# Altium PCB linkit-v4-0.3_6layers.PcbDoc (part 5 of 6)
Units mm, origin at the board's own origin, x right, y up, seen from the top; angles counter-clockwise.
Board outline 70 x 35 mm, 6 copper layers (Top Layer, Int1 (GND), Int2 (Sign), Int3 (Sign), Int4 (PWR), Bottom Layer), stack 1.551 mm thick; 185 components, 156 nets, 761 pads, 1071 vias.
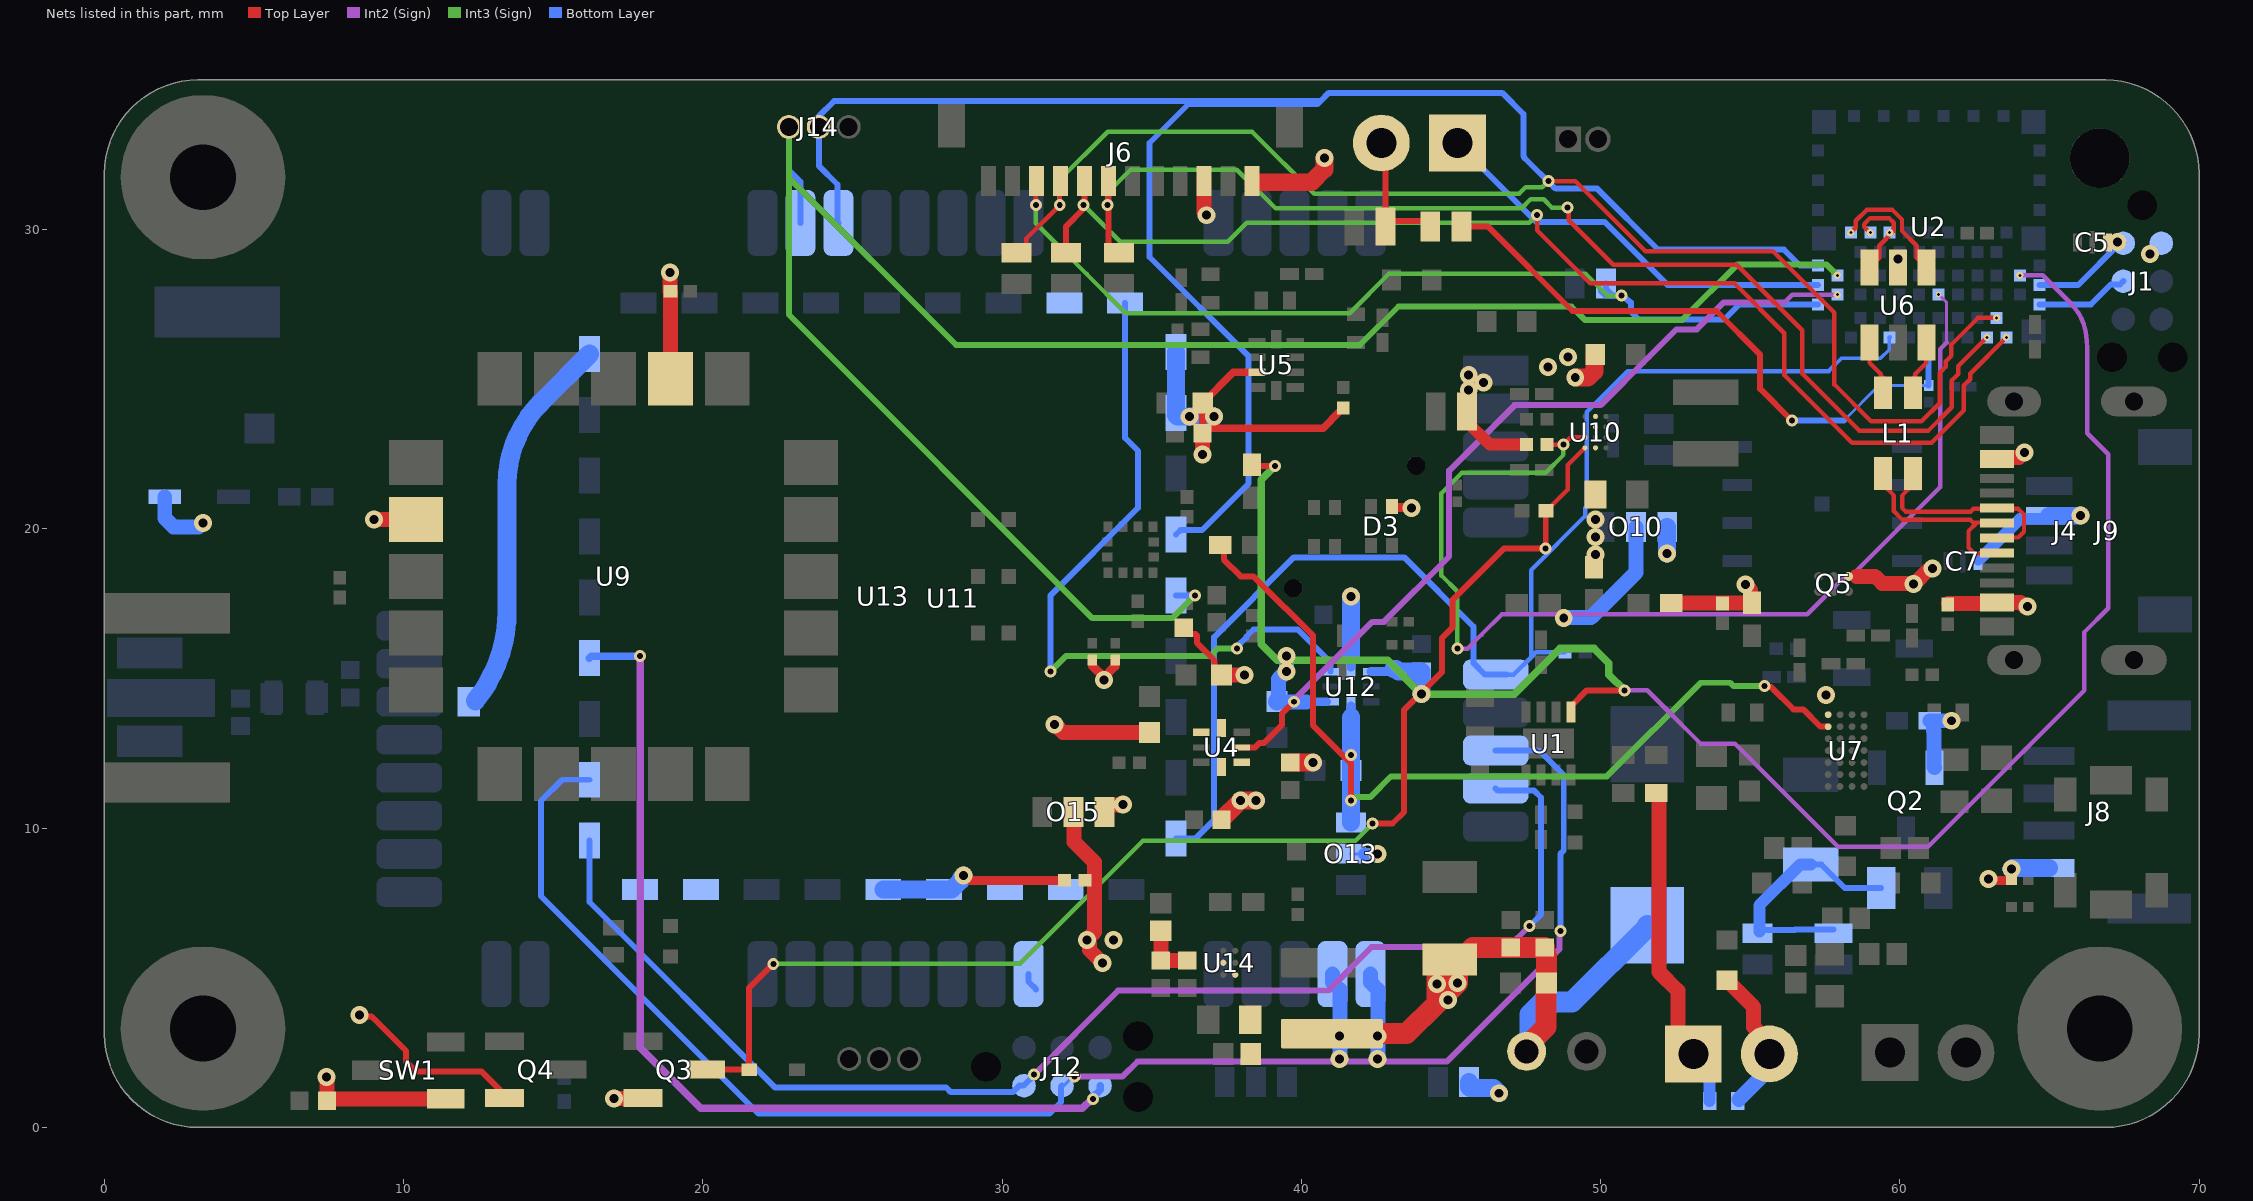
[diagram p8: the nets of this part, all layers, seen from the top]

## Via types
v1: diameter 0.4, hole 0.2, Top Layer to Int1 (GND), tented both sides, 275 vias
v2: diameter 0.4 (per signal layer), hole 0.2, Int1 (GND) to Int2 (Sign), tented both sides, 205 vias
v3: diameter 0.4, hole 0.2, Int1 (GND) to Bottom Layer, tented both sides, 147 vias
v4: diameter 0.4/0.4 (per signal layer), hole 0.2, Int1 (GND) to Int3 (Sign), tented both sides, 103 vias
v5: diameter 0.4, hole 0.2, Int3 (Sign) to Bottom Layer, tented both sides, 48 vias
v6: diameter 0.4, hole 0.2, Top Layer to Int3 (Sign), tented both sides, 46 vias
v7: diameter 0.6, hole 0.3, Top Layer to Int4 (PWR), tented both sides, 38 vias
v8: diameter 0.4/0.4/0.4/0.4 (per signal layer), hole 0.2, Top Layer to Bottom Layer, tented both sides, 33 vias
v9: diameter 0.4, hole 0.2, Int1 (GND) to Int2 (Sign), tented both sides, 23 vias
v10: diameter 0.4, hole 0.2, Int2 (Sign) to Bottom Layer, tented both sides, 20 vias
v11: diameter 0.6, hole 0.3, Int4 (PWR) to Bottom Layer, tented both sides, 19 vias
v12: diameter 0.25, hole 0.1, Int2 (Sign) to Bottom Layer, tented both sides, 17 vias
v13: diameter 0.4, hole 0.2, Top Layer to Int2 (Sign), tented both sides, 16 vias
v14: diameter 0.25, hole 0.1, Int3 (Sign) to Bottom Layer, tented both sides, 14 vias
v15: diameter 0.5, hole 0.2, Top Layer to Bottom Layer, tented both sides, 12 vias
v16: diameter 0.4, hole 0.2, Int2 (Sign) to Int3 (Sign), tented both sides, 10 vias
v17: diameter 0.25, hole 0.1, Top Layer to Bottom Layer, tented both sides, 7 vias
v18: diameter 0.6, hole 0.3, Top Layer to Bottom Layer, tented both sides, 6 vias
v19: diameter 0.4, hole 0.2, Top Layer to Bottom Layer, tented both sides, 5 vias
v20: diameter 0.2, hole 0.1, Int2 (Sign) to Bottom Layer, tented both sides, 5 vias
v21: diameter 0.226, hole 0.1, Top Layer to Int3 (Sign), tented both sides, 5 vias
v22: diameter 0.2, hole 0.1, Int1 (GND) to Bottom Layer, tented both sides, 4 vias
v23: diameter 0.6, hole 0.3, Int1 (GND) to Bottom Layer, tented both sides, 3 vias
v24: diameter 0.3, hole 0.2, Top Layer to Int1 (GND), tented both sides, 3 vias
v25: diameter 0.6, hole 0.3, Int3 (Sign) to Bottom Layer, tented both sides, 2 vias
v26: diameter 0.6, hole 0.3, Top Layer to Int1 (GND), tented both sides, 1 vias
v27: diameter 0.4, hole 0.2, Int4 (PWR) to Bottom Layer, tented both sides, 1 vias
v28: diameter 0.6, hole 0.3, Top Layer to Int2 (Sign), tented both sides, 1 vias
v29: diameter 0.25, hole 0.1, Int1 (GND) to Bottom Layer, tented both sides, 1 vias
v30: diameter 0.169, hole 0.1, Top Layer to Int2 (Sign), tented both sides, 1 vias

## Nets (pads, with @x,y where several pads share a name; then routed paths per layer and width w, separated by ;. In a path a pad name is that pad's centre, name@x,y a point inside that pad or via, vN(x,y) a via of type N, cw(c..) or ccw(c..) an arc to the next point about the centre after c; other vN are vias at no path point) (continued)
SAT_SWCLK: J12.4 U11.8@46.495,12.594 U13.25 | length 53.8
  Int2 (Sign) w0.2: v10(32.414,1.695) 34.021,1.695 34.525,2.198 44.863,2.198 48.631,5.966 48.631,6.542 v10(48.655,6.566)
  Bottom Layer w0.1: J12.4@32.004,1.397 32.06,1.397 32.358,1.695 v10(32.414,1.695) ; U11.8@46.495,12.594 U11.8@47.108,12.594
  Bottom Layer w0.2: U13.25@16.214,11.618 15.301,11.618 14.596,10.913 14.596,7.73 21.863,0.463 31.58,0.463 31.969,0.851 31.969,1.362 J12.4@32.004,1.397 ; U11.8@46.495,12.594 47.949,12.594 48.768,11.775 48.768,9.254 48.655,9.141 v10(48.655,6.566)
SAT_SWDIO: J12.2 U11.9@46.495,11.324 U13.26 | length 44.5
  Int2 (Sign) w0.2: v10(31.07,1.767) 33.875,4.572 40.894,4.572 42.344,6.022 46.916,6.022 v10(47.625,6.731)
  Bottom Layer w0.2: U13.26@16.214,9.586 16.214,7.535 22.406,1.343 28.128,1.343 28.289,1.182 30.361,1.182 30.575,1.397 30.717,1.397 31.07,1.75 v10(31.07,1.767) ; U11.9@46.495,11.324 46.565,11.254 47.778,11.254 48.006,11.026 48.006,7.112 v10(47.625,6.731)
SAT_SWO: J12.6 U13.23 | length 31.5
  Int2 (Sign) w0.25: v10(17.907,15.748) 17.907,2.667 19.939,0.635 32.684,0.635 32.998,0.949 v10(33.038,0.949)
  Bottom Layer w0.25: U13.23@16.214,15.682 16.28,15.748 v10(17.907,15.748) ; v10(33.038,0.949) 33.067,0.978 33.067,1.045 33.274,1.252 J12.6@33.274,1.397
SAT_UART_RX: J14.2 U2.6 U11.38@24.535,30.224 U13.5 | length 62.9
  Bottom Layer w0.2: U11.38@24.535,30.224 24.5,30.259 24.5,31.507 23.876,32.131 J14.2@23.876,33.433 23.876,33.782 24.392,34.298 40.648,34.298 ; U13.5@35.814,19.812 35.966,19.964 36.688,19.964 38.241,21.517 38.241,25.767 34.925,29.083 34.925,32.893 36.229,34.197 40.547,34.197 40.648,34.298 ; U2.6@57.26,28.799 56.659,28.799 56.12,29.337 51.916,29.337 49.884,31.369 48.706,31.369 48.563,31.369 cw(c48.564,31.569) 48.424,31.427 47.474,32.376 cw(c47.616,32.517) 47.416,32.516 47.416,33.864 46.709,34.571 40.921,34.571 40.648,34.298
SAT_UART_TX: J14.3 U2.5 U11.37@23.265,30.224 U13.4 | length 67.3
  Int3 (Sign) w0.2: J14.3@22.876,33.433 22.876,31.734 ; v5(36.449,17.78) 35.687,17.018 33.02,17.018 22.876,27.162 22.876,31.734 ; v14(57.91,28.474) 57.555,28.829 54.568,28.829 52.721,26.982 49.472,26.982 49.022,27.432 43.245,27.432 41.956,26.144 28.466,26.144 22.876,31.734
  Bottom Layer w0.2: J14.3@22.876,33.433 22.876,31.988 23.265,31.599 U11.37@23.265,30.224 ; U13.4@35.814,17.78 v5(36.449,17.78)
SAT_WKUP: R19.2 U2.44 U11.6@46.495,15.134 U13.0 | length 43.6
  Bottom Layer w0.12: 57.617,25.273 58.039,25.695 59.346,25.695 59.642,25.99 U2.44@59.642,26.38
  Bottom Layer w0.15: U11.6@46.855,15.134 47.095,15.134 47.677,15.716 ; R19.2@48.809,15.875 47.836,15.875 47.677,15.716 ; 57.617,25.273 50.906,25.273 49.53,23.897 49.53,20.752 49.48,20.702 49.48,20.428 47.677,18.625 47.677,15.716 ; U2.44@59.642,26.38 U2.44@59.66,26.399
  Bottom Layer w0.2: U13.0@35.814,9.652 36.449,9.652 37.084,10.287 37.084,16.383 39.751,19.05 43.434,19.05 45.745,16.739 45.745,15.523 46.134,15.134 U11.6@46.675,15.134 ; U11.6@46.495,15.134 U11.6@46.855,15.134
SLOW_SWS_SEND: J10.1 U2.4 | length 14
  Bottom Layer w0.146: 47.836,30.269 ccw(c47.94,30.372) 47.852,30.255
  Bottom Layer w0.2: J10.1@45.212,32.893 47.836,30.269 ; 47.852,30.255 50.136,30.255 52.242,28.149 U2.4@57.26,28.149
SMD_ANT: L4.2 U13.18 | length 12.8
  Bottom Layer w0.642: L4.2@12.405,14.258 ccw(c8.698,17.25) 13.462,17.25 13.462,21.501 cw(c17.303,21.499) 14.587,24.215 U13.18@16.214,25.842
SMD_RF_BUSY: U13.27
SMD_RF_NRST: U13.28
SMD_SCL: U13.33
SMD_SDA: U13.34
SMD_VPA_GOOD: U13.10
SPI_CLK: J6.8 O2.2 U2.32 | length 40.7
  Top Layer w0.15: v6(47.879,30.48) 47.879,29.972 49.651,28.2 54.477,28.2 56.14,26.537 56.14,25.14 58.4,22.88 61.058,22.88 62.135,23.957 62.135,24.792 62.346,25.004 62.346,25.185 v17(63.56,26.399)
  Top Layer w0.2: O2.2@32.131,29.223 32.131,30.101 32.754,30.724 J6.8@32.754,31.623
  Int3 (Sign) w0.15: v6(32.728,30.815) 33.952,29.591 37.545,29.591 38.18,30.226 47.619,30.226 47.873,30.48 v6(47.879,30.48)
SPI_MISO: J6.9 O4.2 U2.33 | length 44.4
  Top Layer w0.15: O4.2@30.48,29.223 30.548,29.223 30.803,29.478 30.803,29.69 v6(31.928,30.815) J6.9@31.928,31.493 ; J6.9@31.779,31.344 J6.9@31.928,31.493 ; v6(48.26,31.623) 49.149,31.623 51.488,29.284 55.753,29.284 57.813,27.224 57.813,25.745 57.813,24.824 59.048,23.589 60.713,23.589 61.327,24.203 61.327,25.213 61.538,25.424 61.538,25.598 61.722,25.782 61.722,26.162 62.609,27.049 v17(63.235,27.049) ; J6.9@31.928,31.493 31.954,31.519 J6.9@31.954,31.623 31.928,31.597 J6.9@31.928,31.493
  Int3 (Sign) w0.15: v6(31.928,30.815) 31.903,30.84 31.903,31.649 33.528,33.274 38.354,33.274 40.433,31.195 47.275,31.195 47.493,31.413 48.047,31.413 48.257,31.623 v6(48.26,31.623)
SPI_MOSI: J6.7 O3.2 U2.34 | length 39.6
  Top Layer w0.15: v6(48.895,30.734) 48.938,30.691 48.938,30.309 50.418,28.829 54.547,28.829 56.742,26.634 56.742,25.745 56.742,25.189 58.644,23.287 60.954,23.287 61.731,24.064 61.731,24.96 61.942,25.171 61.942,25.431 v17(62.91,26.399)
  Top Layer w0.2: J6.7@33.554,31.623 33.554,30.815 33.554,29.453 33.784,29.223 O3.2@33.909,29.223
  Int3 (Sign) w0.15: v6(33.528,30.815) 33.528,31.24 34.292,32.004 37.846,32.004 39.139,30.711 47.362,30.711 47.66,31.009 48.098,31.009 48.373,30.734 v6(48.895,30.734)
SPI_NSS: J6.10 O1.2 U2.2 | length 31.9
  Top Layer w0.15: v6(31.128,30.815) 31.128,31.597 J6.10@31.154,31.623
  Int3 (Sign) w0.15: v6(31.128,30.815) 31.128,30.213 32.824,28.517 34.136,27.205 41.613,27.205 42.925,28.517 49.5,28.517 50.22,27.797 v5(50.694,27.797)
  Bottom Layer w0.2: O1.2@50.016,27.94 50.159,27.797 50.405,27.797 50.178,28.024 O1.2@50.178,28.028 ; O1.2@50.178,28.194 O1.2@50.178,28.028 ; U2.2@57.26,27.499 54.638,27.499 54.134,26.995 51.278,26.995 51.009,27.264 51.009,27.558 50.946,27.621 50.924,27.621 50.748,27.797 v5(50.694,27.797) 50.408,27.797 O1.2@50.178,28.028
SPV+: C56.1 J15.1 R54.1 | length 11.1
  Top Layer w0.5: R54.1@51.858,11.176 51.904,11.176 51.954,11.126 51.954,5.196 52.578,4.572 52.578,2.977 J15.1@53.097,2.458
  Bottom Layer w0.4: J15.1@53.097,2.458 53.639,1.916 C56.1@53.639,0.88
SPV-: C56.2 FB5.1 J15.2 | length 5
  Top Layer w0.5: FB5.1@54.229,4.913 54.254,4.913 54.329,4.838 54.329,4.813 55.11,4.032 55.11,3.364 55.637,2.837 J15.2@55.637,2.458
  Bottom Layer w0.5: C56.2@54.626,0.942 55.369,1.685 55.369,2.19 J15.2@55.637,2.458
STAT_LED: R13.2 U1.5 U2.27 | length 58.9
  Top Layer w0.2: R13.2@38.354,22.14 38.396,22.098 v6(39.116,22.098) ; U1.5@49.01,13.877 49.01,14.077 49.538,14.605 v6(50.8,14.605)
  Int2 (Sign) w0.15: v6(50.8,14.605) 51.562,14.605 53.34,12.827 54.483,12.827 57.934,9.376 60.938,9.376 66.167,14.605 66.167,16.553 66.96,17.346 66.96,22.499 66.259,23.201 66.259,25.146 66.259,25.78 66.258,25.989 ccw(c66.108,25.989) 66.258,25.992 ccw(c63.719,25.933) 66.238,26.257 ccw(c64.43,26.257) 65.709,27.535 64.77,28.474 v12(64.01,28.474)
  Int3 (Sign) w0.254: v6(39.116,22.098) 38.662,21.644 38.662,16.142 39.195,15.609 42.88,15.609 44.011,14.478 47.117,14.478 48.641,16.002 49.784,16.002 50.278,15.508 50.278,15.127 v6(50.8,14.605)
SWDCLK: J1.4 U2.30 | length 3.1
  Bottom Layer w0.2: U2.30@64.66,27.499 66.383,27.499 67.048,28.164 67.354,28.164 J1.4@67.466,28.276
SWDIO: J1.2 U2.28 | length 3.4
  Bottom Layer w0.2: U2.28@64.66,28.149 65.953,28.149 67.351,29.546 J1.2@67.466,29.546
SWS: C3.2 O6.2 U2.40 | length 21
  Top Layer w0.2: O6.2@45.352,30.099 46.241,30.099 49.06,27.28 53.873,27.28 55.33,25.823 55.33,24.68 v19(56.388,23.622)
  Bottom Layer w0.1: 58.13,23.622 59.297,24.789 60.39,24.789 60.392,24.791 C3.2@60.96,24.791
  Bottom Layer w0.2: v19@56.416,23.622 58.13,23.622 ; C3.2@60.96,24.791 U2.40@60.96,26.399
SWS_IN: J10.2 O6.1 O8.1 | length 4.5
  Top Layer w0.2: J10.2@42.672,32.893 42.812,32.753 O8.1@42.812,30.281 ; O8.1@42.812,30.099 O8.1@42.812,30.243 ; O6.1@44.31,30.099 44.128,30.281 O8.1@42.812,30.281 ; O8.1@42.812,30.243 O8.1@42.812,30.281 ; O8.1@42.812,30.243 42.773,30.281 O8.1@42.812,30.281
USB_D_N: U2.10 U6.6 | length 3.4
  Top Layer w0.146: U6.6@58.985,28.728 59.308,29.051 59.308,29.463 59.798,29.954 59.798,30.226 59.639,30.385 59.004,30.385 58.801,30.182 58.801,30.099 59.001,29.899 v17(59.01,29.899)
USB_D_P: U2.8 U6.4 | length 4.2
  Top Layer w0.146: v17(58.36,29.899) 58.528,30.066 58.528,30.295 58.891,30.658 59.753,30.658 60.072,30.339 60.072,29.954 60.562,29.463 60.562,29.051 U6.4@60.885,28.728
USB_L_N: L1.3 U6.1 | length 2.4
  Top Layer w0.146: U6.1@58.985,26.228 58.985,25.555 59.363,25.177 59.363,24.871 59.436,24.798 59.452,24.814 59.452,25.052 59.452,24.564 L1.3@59.436,24.548
USB_L_P: L1.2 U6.3 | length 1.8
  Top Layer w0.146: L1.2@60.436,24.548 60.452,24.564 60.452,24.871 L1.2@60.452,25.052 ; L1.2@60.509,25.052 60.509,25.179 60.885,25.555 U6.3@60.885,26.228
USB_N: J4.A7 J4.B7 L1.4 | length 7
  Top Layer w0.146: L1.4@59.436,21.848 59.436,21.475 59.799,21.112 59.799,20.588 60.086,20.301 62.359,20.301 62.446,20.214 62.532,20.214 63.22,20.214 J4.A7@63.243,20.191 ; 62.532,20.168 62.291,19.926 62.291,19.37 62.484,19.177 63.229,19.177 J4.B7@63.243,19.191
USB_P: J4.A6 J4.B6 L1.1 | length 7.1
  Top Layer w0.146: L1.1@60.436,21.848 60.436,21.475 60.073,21.112 60.073,20.701 60.2,20.574 62.359,20.574 62.453,20.668 J4.B6@63.243,20.668 ; J4.A6@63.243,19.691 63.266,19.714 63.954,19.714 64.145,19.905 64.145,20.477 63.954,20.668 63.266,20.668 J4.B6@63.243,20.691
USR_IO2: U11.16@30.885,5.124 | length 0.6
  Bottom Layer w0.2: U11.16@30.885,5.124 30.885,4.87 30.894,4.861 U11.16@31.139,4.616
VADC_EN: U2.3 U4.2 | length 28.1
  Top Layer w0.2: U4.2@38.013,12.7 38.456,12.7 38.608,12.852 38.76,12.852 39.347,13.439 39.347,13.82 v13(39.751,14.224)
  Int2 (Sign) w0.15: 56.134,27.559 56.399,27.824 v12(57.91,27.824)
  Int2 (Sign) w0.2: v13(39.751,14.224) 39.751,14.268 42.374,16.891 42.755,16.891 44.941,19.077 44.941,21.949 47.129,24.137 50.002,24.137 51.609,25.745 52.535,26.67 53.213,26.67 54.102,27.559 56.134,27.559
VBAT: C1.1 C19.2 C20.1 C21.1 C22.1 C41.1 C50.1 C51.1 C52.2 J5.1 J6.3 L5.1 O9.1 Q2.2 Q3.2 R4.1 R9.1 R55.2 SW1.1 U10.A2 U14.A1 | length 31.8
  Top Layer w0.4: O9.1@45.533,23.92 45.533,23.583 46.297,22.819 R9.1@47.525,22.819
  Top Layer w0.5: v7(7.43,1.687) 7.438,1.679 7.438,0.896 C1.1@7.445,0.889 ; C1.1@7.493,0.955 SW1.1@11.41,0.955 ; v7(17.031,0.971) Q3.2@17.968,0.971 ; J6.3@36.754,31.623 36.754,30.583 36.83,30.507 v7(36.83,30.48)
  Top Layer w0.7: L5.1@41.021,3.133 43.519,3.133 44.528,4.142 ; C19.2@44.406,5.42 44.528,5.42 v7(44.528,4.8) 44.528,4.142 ; C19.2@44.958,5.605 45.212,5.351 v7(45.212,4.826) 44.528,4.142 ; C19.2@45.333,5.605 45.742,6.014 C20.1@46.987,6.014 ; C20.1@47.145,6.017 C21.1@48.133,6.017 ; J5.1@47.53,2.54 47.53,2.702 48.182,3.354 48.182,4.82 C22.1@48.188,4.826 48.188,5.753 C21.1@48.163,5.778
  Bottom Layer w0.5: R4.1@61.002,13.589 R4.1@61.077,13.589 ; Q2.2@61.158,12.022 61.137,12.043 61.137,13.246 61.127,13.256 61.127,13.539 R4.1@61.077,13.589 ; v11(61.722,13.589) R4.1@61.077,13.589
  Bottom Layer w0.7: J5.1@47.53,2.54 47.645,2.655 47.645,3.781 48.055,4.191 49.049,4.191 51.562,6.704 C50.1@51.562,6.754
  other v7: 44.899,4.253 49.835,19.137 49.835,19.731 49.835,20.317 45.593,24.638 46.087,24.892 45.593,25.146
VBAT_SENSE: O5.2 O7.1 R5.2 R6.1 | length 8.2
  Bottom Layer w0.2: O5.2@55.245,6.49 O5.2@55.303,6.49 ; O5.2@55.433,6.604 56.488,6.604 56.501,6.617 O7.1@57.785,6.617 ; R6.1@57.023,8.787 57.373,8.787 58.159,8.001 R5.2@59.375,8.001
  Bottom Layer w0.4: O5.2@55.306,6.555 55.306,7.42 56.673,8.787 R6.1@57.023,8.787
VBUS: C17.2 C18.2 J4.A4_B9 J4.B4_A9 Q5.A1 R35.1 R52.2 U2.12 U6.5 U7.G4 | length 10.1
  Top Layer w0.4: v26(59.936,29.017) 59.936,28.964 U6.5@59.944,28.956 ; C17.2@61.595,17.495 C17.2@61.595,17.475 C17.2@61.628,17.508 ; J4.A4_B9@63.21,17.508 J4.A4_B9@63.243,17.541
  Top Layer w0.5: R52.2@52.366,17.526 R35.1@55.061,17.526 55.011,17.576 55.011,17.956 54.845,18.122 v7(54.845,18.149) ; 58.551,18.416 59.17,18.416 59.406,18.18 60.433,18.18 v7(60.452,18.161) 60.479,18.161 60.968,18.65 61.068,18.65 v7(61.087,18.669) ; C17.2@61.628,17.508 J4.A4_B9@63.21,17.508 ; J4.B4_A9@63.243,22.341 63.293,22.391 63.983,22.391 64.143,22.551 v7(64.17,22.551) ; J4.A4_B9@63.279,17.555 63.558,17.555 63.568,17.545 64.027,17.545 64.154,17.418 64.243,17.418 v7(64.262,17.399)
  other v7: 57.531,14.452
  other v29: 59.66,29.899
VCC_SEL: R9.2 U2.52 U10.B3 | length 36.7
  Top Layer w0.15: R9.2@48.205,22.819 v6(48.759,22.819) 48.999,23.058 U10.B3@49.461,23.058
  Int2 (Sign) w0.1: v20@61.308,27.824 61.558,27.574 61.558,26.223
  Int2 (Sign) w0.15: v16(45.212,16.002) 45.555,16.002 46.022,16.469 46.702,17.149 56.9,17.149 58.108,18.357 58.312,18.357 61.341,21.386 61.341,25.745 61.341,26.006 61.558,26.223 ; v20(61.285,27.824) v20@61.308,27.824
  Int3 (Sign) w0.15: v16(45.212,16.002) 45.212,17.913 44.683,18.442 44.683,20.228 44.683,20.666 44.683,21.188 45.368,21.873 48.162,21.873 48.759,22.47 v6(48.759,22.819)
VPA_EN: U12.7 U13.9 | length 24.4
  Int3 (Sign) w0.2: v5(31.623,15.24) 32.131,15.748 36.957,15.748 37.211,16.002 v5(37.846,16.002)
  Bottom Layer w0.2: v5(31.623,15.24) 31.623,17.78 34.544,20.701 34.544,22.606 34.114,23.036 U13.9@34.114,27.547 ; v5(37.846,16.002) 37.846,16.056 38.167,16.377 38.167,16.404 38.4,16.637 39.878,16.637 40.975,15.54 40.975,15.238 U12.7@40.981,15.232
VSAT: C53.2 C54.2 C55.2 O10.2 O15.2 R49.1 U11.11@42.315,5.124 U11.12@41.045,5.124 U14.B2 | length 18
  Top Layer w0.5: O15.2@32.385,10.541 32.407,10.519 32.407,9.545 33.089,8.863 33.089,6.53 32.842,6.283 v7(32.842,6.256) ; v7@32.842,6.229 32.927,6.144 32.927,5.923 33.35,5.5 v7(33.35,5.494) ; C53.2@35.306,6.567 C55.2@35.306,5.582 C54.2@36.195,5.582
  Bottom Layer w0.5: U11.12@41.045,5.124 41.045,4.846 41.287,4.604 v11@41.287,3.048 ; v11(41.275,2.286) 41.287,2.298 v11@41.287,3.048 ; v11(41.275,3.048) v11@41.287,3.048 ; U11.11@42.315,5.124 42.315,4.846 42.557,4.604 v11@42.557,3.048 ; v11(42.545,2.286) 42.557,2.298 v11@42.557,3.048 ; v11(42.545,3.048) v11@42.557,3.048 ; v11(48.768,17.018) 48.787,17.037 49.676,17.037 51.181,18.542 O10.2@51.181,20.066
  other v7: 33.731,6.256
VSENS_1: C8.1 C12.2 C13.1 R28.1 R29.2 U4.4 U5.8 | length 12
  Top Layer w0.2: R29.2@36.068,16.695 36.278,16.485 36.461,16.485 36.509,16.437 36.509,16.196 37.103,15.602 37.103,15.348 C8.1@37.338,15.113 ; C12.2@36.703,23.189 C12.2@36.705,23.191 ; R28.1@41.282,23.924 41.292,23.924 41.402,24.034 R28.1@41.402,24.044
  Top Layer w0.25: C12.2@36.705,23.191 C12.2@36.705,23.193 ; U5.8@38.521,25.228 37.726,25.228 C13.1@36.705,24.207 C12.2@36.705,23.193 ; R28.1@41.282,23.924 40.726,23.368 36.88,23.368 C12.2@36.705,23.193
  Top Layer w0.5: v7(36.703,22.479) C12.2@36.703,23.189 ; C8.1@37.338,15.113 v7(38.1,15.113)
VSENS_2: C10.1 C39.1 D4.2 U4.5 U9.2 U9.17 | length 10.4
  Top Layer w0.5: v7(9.017,20.32) 10.413,20.32 U9.2@10.418,20.315 ; C39.1@18.898,27.94 v7@18.898,28.566 ; U9.17@18.918,25.015 C39.1@18.918,27.94 ; v7(31.75,13.462) 31.777,13.462 32.035,13.204 34.825,13.204 34.829,13.2 C10.1@34.925,13.2
  Bottom Layer w0.5: D4.2@2.023,21.074 2.023,20.36 2.316,20.067 3.149,20.067 3.275,20.193 v11(3.302,20.193)
  other v7: 18.899,28.566
VSYS: C5.1 C7.1 C9.2 C11.2 C42.1 C43.2 C46.2 D3.1 J1.1 J6.1 J8.1 J9.2 O10.3 O13.2 O14.1 O15.3 Q4.2 R1.2 R2.2 R16.2 U4.1 U4.8 U10.C2 U10.D2 U12.1 U12.8 | length 30.3
  Top Layer w0.2: v18(8.529,3.759) 8.574,3.714 8.932,3.714 10.091,2.555 10.091,2.197 10.414,1.874 12.604,1.874 13.232,1.246 13.232,0.929 Q4.2@13.37,0.791 ; C9.2@39.624,12.2 C9.2@39.632,12.192
  Top Layer w0.252: R1.2@33.02,15.621 33.03,15.611 R1.2@33.03,15.597 ; R2.2@33.772,15.597 33.772,15.611 R2.2@33.782,15.621 ; R16.2@63.554,8.255 R16.2@63.728,8.255
  Top Layer w0.3: R1.2@33.03,15.597 33.03,15.416 v7@33.407,15.039 ; v7(33.407,14.958) v7@33.407,15.039 ; R2.2@33.772,15.597 33.772,15.404 v7@33.407,15.039 ; D3.1@43.022,20.742 43.043,20.721 43.668,20.721 v7(43.688,20.701) ; v7(62.962,8.3) 63.007,8.255 R16.2@63.554,8.255 ; C5.1@66.929,29.576 66.929,29.577 v7(67.273,29.579) v7(67.273,29.579)
  Top Layer w0.5: O15.3@33.426,10.541 33.426,10.696 33.507,10.776 34.017,10.776 v7(34.036,10.795)
  Top Layer w0.6: C11.2@37.338,10.287 v7(37.973,10.922) v7(38.481,10.922) ; J6.1@38.404,31.582 40.334,31.582 40.767,32.015 v7(40.767,32.385) ; C9.2@39.632,12.192 v7(40.386,12.192) ; v7(49.152,25.051) 49.584,25.051 49.799,25.266 C42.1@49.799,25.795
  Bottom Layer w0.1: O13.2@41.656,9.144 O13.2@42.089,9.144
  Bottom Layer w0.292: U12.1@42.331,15.232 42.989,15.232 43.073,15.316
  Bottom Layer w0.294: U12.8@41.656,15.382 41.656,15.741
  Bottom Layer w0.302: C7.1@62.603,18.923 62.603,18.973 C7.1@62.652,19.022
  Bottom Layer w0.4: O13.2@42.089,9.144 v11(42.545,9.144) ; C7.1@62.652,19.022 62.653,19.023 62.703,19.023 64.019,20.339 64.887,20.339 J9.2@64.987,20.439
  Bottom Layer w0.6: 41.656,15.741 C46.2@41.656,17.13 v11(41.656,17.734) ; 43.073,15.316 43.16,15.316 43.244,15.232 C43.2@44.014,15.232 v11(44.014,14.478) ; O14.1@45.606,1.524 45.606,1.354 45.636,1.324 46.428,1.324 v11(46.609,1.143) ; v11(52.222,19.177) O10.3@52.222,20.066 ; v11(63.728,8.637) 63.757,8.666 J8.1@64.979,8.666 ; J9.2@64.987,20.439 66.032,20.439 v11(66.04,20.447)
  other v7: 48.244,25.403 48.91,25.743
  other v11: 68.356,29.18
VSYS_EN: D1.1 Q3.3 R8.2 U10.A3 | length 44
  Top Layer w0.15: R8.2@48.175,20.613 48.2,20.613 48.895,21.308 48.895,22.124 U10.A3@49.478,22.707
  Top Layer w0.2: Q3.3@20.1,1.93 D1.1@21.552,1.93 21.552,4.662 v6(22.355,5.465) ; v6(42.383,10.155) 43.048,10.155 43.434,10.541 43.434,13.952 44.696,15.213 44.696,16.35 45.059,16.713 45.059,17.627 46.769,19.337 v13(48.158,19.337) 48.166,19.345 48.166,20.605 R8.2@48.175,20.613
  Int3 (Sign) w0.15: v6(22.355,5.465) 30.591,5.465 34.698,9.572 41.801,9.572 v6(42.383,10.155)
VSYS_SMD: C44.1 O13.3 R49.2 U12.4 U13.31 U13.32 | length 10.2
  Top Layer w0.3: v18(28.718,8.424) 28.8,8.424 28.968,8.255 R49.2@32.086,8.255
  Bottom Layer w0.294: U12.4@41.656,14.082 41.656,13.932 41.659,13.929 41.659,13.72 41.668,13.711
  Bottom Layer w0.6: U13.31@26.031,7.947 U13.32@28.063,7.947 ; U13.32@28.144,7.947 28.313,7.947 28.621,8.255 28.621,8.326 v18(28.718,8.424) ; O13.3@41.656,10.185 v27(41.656,12.446) 41.656,13.699 41.668,13.711
VSYS_VPA: C45.1 U12.5 U13.7 U13.8 | length 6.7
  Bottom Layer w0.292: 40.166,14.221 U12.5@40.852,14.221
  Bottom Layer w0.5: C45.1@39.199,14.221 40.166,14.221 ; C45.1@39.238,14.282 39.238,14.981 v11(39.497,15.24) v11(39.497,15.748)
  Bottom Layer w0.6: U13.8@35.814,25.908 35.814,23.797 35.864,23.747 v11(36.266,23.747) ; v11@36.272,23.749 v11(37.084,23.749) ; C45.1@39.188,14.232 C45.1@39.238,14.282
WIRELESS_NCHG_LED: R14.1 U7.F4 | length 28.8
  Top Layer w0.2: R14.1@37.296,19.457 37.414,19.339 37.414,18.974 37.973,18.415 38.395,18.415 39.458,17.352 39.476,17.352 40.386,16.442 40.386,13.441 41.656,12.171 v6(41.656,10.922) ; v6(55.474,14.751) 55.512,14.713 55.7,14.713 56.443,13.97 56.769,13.97 57.347,13.392 U7.F4@57.601,13.392
  Int3 (Sign) w0.2: v6(41.656,10.922) 41.783,11.049 42.314,11.049 42.995,11.73 50.211,11.73 53.34,14.859 54.326,14.859 54.434,14.751 v6(55.474,14.751)
pads on no net: J1.H1 J1.H2 J1.H3 J4.A8 J4.B8 J9.S1 J9.S2 J12.H1 J12.H2 J12.H3 MEC1.1 MEC1.2 MH1.0 Q5.B1 Q5.B2 U2.15 U2.59 U2.65 U2.66 U2.67 U2.68 U2.69 U2.70 U2.71 U2.72 U2.73 U2.74 U2.75 U2.76 U2.77 U2.78 U8. U8.4 U8.11 U11.1@45.895,25.294 U11.2@45.895,24.024 U11.3@45.895,22.754 U11.4@45.895,21.484 U11.5@45.895,20.214 U11.6@45.895,15.134 U11.7@45.895,13.864 U11.8@45.895,12.594 U11.9@45.895,11.324 U11.10@45.895,10.054 U11.11@42.315,5.724 U11.12@41.045,5.724 U11.13@39.775,5.724 U11.14@38.505,5.724 U11.15@37.235,5.724 U11.16@30.884,5.724 U11.17@29.615,5.724 U11.18@28.345,5.724 U11.19@27.074,5.724 U11.20 U11.21@24.535,5.724 U11.22 U11.23 U11.24@14.375,5.724 U11.25 U11.26@10.795,7.874 U11.27 U11.28 U11.29@10.795,11.684 U11.30@10.795,12.954 U11.31@10.795,14.224 U11.32@10.795,15.494 U11.33@10.795,16.764 U11.34@13.105,29.624 U11.35@14.375,29.624 U11.36@21.995,29.624 U11.37@23.265,29.624 U11.38@24.535,29.624 U11.39@25.805,29.624 U11.40@27.075,29.624 U11.41@28.345,29.624 U11.42@29.615,29.624 U11.43@30.885,29.624 U11.44 U11.45@38.505,29.624 U11.46 U11.47@41.045,29.624 U11.48 U13.11 U13.12

## Polygon pours and split planes (outlines as drawn)
GND on Top Layer "TOPGND" (solid, remove dead copper, pour order 0): 0,0 70,0 70,35.001 0,35.001
GND on Bottom Layer "BOTGND" (solid, remove dead copper, pour order 4): 0,-0.127 70,-0.127 70,34.874 0,34.874
GND on Int3 (Sign) "L3_GND" (solid, remove dead copper, pour order 3): 0,0 70,0 70,35.001 0,35.001
GND on Int2 (Sign) "L2_GND" (solid, remove dead copper, pour order 2): 0,0 70,0 70,35.001 0,35.001
VBAT on Int4 (PWR) (split plane): 43.926,25.892 43.968,25.86 44.017,25.84 44.069,25.833 46.144,25.833 49.455,22.522 49.455,21.717 49.455,21.336 49.455,21.209 49.462,21.157 49.482,21.108 49.514,21.066 49.556,21.034 49.605,21.014 49.657,21.007 49.695,21.012 51.106,19.601 51.106,15.832 48.244,12.97 48.212,12.928 48.192,12.879 48.185,12.827 48.185,9.652 48.192,9.6 48.212,9.551 48.244,9.509 48.625,9.128 48.667,9.096 48.716,9.076 48.768,9.069 58.547,9.069 58.599,9.076 58.648,9.096 58.69,9.128 60.976,11.414 61.008,11.456 61.028,11.505 61.035,11.557 61.035,13.886 61.171,14.022 62.061,14.022 62.536,13.547 62.536,10.625 61.96,10.049 58.971,7.06 49.53,7.06 49.478,7.053 49.429,7.033 49.387,7.001 45.831,3.445 45.799,3.403 45.779,3.354 45.772,3.302 45.772,0.511 6.933,0.511 6.933,2.556 9.002,2.556 9.054,2.563 9.103,2.583 9.145,2.615 11.063,4.534 31.764,4.534 31.776,4.524 31.825,4.504 31.877,4.497 31.929,4.504 31.978,4.524 31.99,4.534 36.173,4.534 39.071,1.635 39.113,1.603 39.162,1.583 39.214,1.576 43.053,1.576 43.105,1.583 43.154,1.603 43.196,1.635 43.577,2.016 43.609,2.058 43.629,2.107 43.636,2.159 43.636,5.25 46.117,7.731 46.149,7.773 46.155,7.787 46.169,7.822 46.176,7.874 46.176,13.124 49.927,16.875 49.959,16.917 49.979,16.966 49.986,17.018 49.986,17.272 49.979,17.324 49.959,17.373 49.927,17.415 49.165,18.177 49.123,18.209 49.074,18.229 49.022,18.236 48.641,18.236 48.589,18.229 48.54,18.209 48.498,18.177 47.942,17.621 45.541,20.023 45.541,22.225 45.534,22.277 45.514,22.326 45.482,22.368 43.577,24.273 43.535,24.305 43.486,24.325 43.434,24.332 41.74,24.332 35.762,30.31 35.762,30.904 36.152,31.294 38.524,31.294
VSYS on Int4 (PWR) (split plane): 237 vertices, not listed, extent 0.509,0.509 69.491,34.491
VSENS_2 on Int4 (PWR) (split plane): 32.564,17.188 32.564,13.165 32.174,12.775 31.072,12.775 30.174,13.673 30.174,16.032 30.167,16.084 30.147,16.132 30.115,16.174 18.841,27.448 18.799,27.48 18.751,27.5 18.699,27.507 12.954,27.507 12.902,27.5 12.853,27.48 12.811,27.448 10.398,25.035 10.366,24.993 10.346,24.944 10.339,24.892 10.339,20.023 9.568,19.252 3.005,19.252 2.107,20.15 2.107,20.871 2.624,21.388 4.191,21.388 4.243,21.395 4.292,21.415 4.334,21.447 12.657,29.77 19.982,29.77
VSYS_SMD on Int4 (PWR) (split plane): 42.343,11.26 39.032,7.949 32.131,7.949 32.079,7.942 32.03,7.922 32.004,7.902 31.978,7.922 31.929,7.942 31.877,7.949 28.007,7.949 28.007,8.267 28.007,8.819 29.146,9.958 39.497,9.958 39.549,9.965 39.598,9.985 39.64,10.017 41.164,11.541 41.196,11.583 41.216,11.632 41.223,11.684 41.223,13.006 42.343,13.006
VSAT on Int4 (PWR) (split plane): 49.582,17.188 49.582,17.102 45.831,13.351 45.799,13.309 45.779,13.26 45.772,13.208 45.772,7.958 43.291,5.477 43.259,5.435 43.239,5.386 43.232,5.334 43.232,2.243 42.969,1.98 39.297,1.98 36.399,4.878 36.357,4.91 36.309,4.93 36.256,4.937 32.079,4.937 32.079,7.409 32.215,7.545 43.307,7.545 43.359,7.552 43.408,7.572 43.45,7.604 44.466,8.62 44.498,8.662 44.518,8.711 44.525,8.763 44.525,13.632 48.725,17.832 48.938,17.832
VBUS on Int4 (PWR) (split plane): 65.33,22.649 65.33,17.61 64.559,16.839 60.706,16.839 60.654,16.832 60.605,16.812 60.563,16.78 57.574,13.791 57.361,13.791 54.431,16.721 54.431,18.839 54.694,19.102 60.071,19.102 60.123,19.109 60.172,19.129 60.214,19.161 63.838,22.785 65.194,22.785
VSENS_1 on Int4 (PWR) (split plane): 37.898,22.014 37.898,18.479 37.898,16.418 37.905,16.366 37.925,16.317 37.957,16.275 38.66,15.572 38.66,14.385 38.665,14.346 38.364,14.045 38.057,14.045 36.016,16.086 36.016,22.776 36.152,22.912 37,22.912
VSYS_VPA on Int4 (PWR) (split plane): 39.422,22.522 39.422,20.193 39.429,20.141 39.449,20.092 39.481,20.05 40.819,18.712 40.819,15.324 40.082,14.586 39.064,14.586 39.064,15.656 39.057,15.708 39.037,15.757 39.005,15.799 38.302,16.502 38.302,18.479 38.302,22.098 38.295,22.15 38.275,22.199 38.243,22.241 37.227,23.257 37.185,23.289 37.136,23.309 37.084,23.316 36.068,23.316 36.016,23.309 35.967,23.289 35.925,23.257 35.73,23.062 35.263,23.062 35,23.325 35,23.919 35.517,24.436 37.508,24.436
GND on Int1 (GND) (split plane): 3.125,34.49 51.943,34.49 51.943,30.099 58.826,30.099 58.826,29.623 58.826,25.959 58.834,25.92 58.856,25.887 63.175,21.567 63.208,21.545 63.247,21.537 65.255,21.537 65.294,21.545 65.327,21.567 65.349,21.6 65.357,21.639 65.357,22.987 65.349,23.026 65.327,23.059 65.294,23.081 65.255,23.089 63.881,23.089 63.85,23.083 63.04,23.083 60.681,25.442 60.681,28.448 60.681,29.301 60.673,29.34 60.651,29.373 60.427,29.597 60.427,30 60.525,30.099 69.49,30.099 69.49,3.125 69.491,3.113 69.482,2.92 69.452,2.691 69.402,2.466 69.333,2.247 69.245,2.034 69.138,1.829 69.015,1.635 68.874,1.452 68.718,1.282 68.548,1.126 68.366,0.986 68.171,0.862 67.967,0.755 67.754,0.667 67.534,0.598 67.309,0.548 67.08,0.518 66.885,0.509 66.875,0.51 3.125,0.511 3.115,0.51 2.92,0.518 2.691,0.548 2.466,0.598 2.247,0.668 2.034,0.756 1.829,0.862 1.635,0.986 1.452,1.126 1.282,1.282 1.126,1.452 0.986,1.635 0.862,1.829 0.755,2.034 0.667,2.247 0.598,2.467 0.548,2.692 0.518,2.92 0.509,3.115 0.51,3.126 0.51,3.301 0.51,3.304 0.51,31.875 0.509,31.885 0.518,32.081 0.548,32.309 0.598,32.534 0.667,32.754 0.756,32.967 0.862,33.171 0.986,33.366 1.126,33.549 1.282,33.719 1.452,33.874 1.635,34.015 1.829,34.139 2.034,34.245 2.247,34.333 2.466,34.403 2.691,34.453 2.92,34.483 3.113,34.491
PGND2 on Int1 (GND) (split plane): 40.438,9.187 40.438,4.656 37.508,1.726 36.279,1.726 34.238,3.767 34.238,7.79 36.152,9.704 39.921,9.704
PGND1 on Int1 (GND) (split plane): 52.122,26.205 52.122,20.658 51.605,20.141 47.328,20.141 46.049,21.42 46.049,26.713 47.201,27.865 50.462,27.865
AGND on Int1 (GND) (split plane): 43.105,28.745 43.105,28.151 41.191,26.237 36.66,26.237 36.465,26.432 35.762,27.135 35.762,28.872 36.406,29.516 42.334,29.516
VBUS on Int1 (GND) (split plane): 60.231,30.082 60.223,30.043 60.223,29.555 60.231,29.516 60.253,29.483 60.477,29.259 60.477,28.448 60.477,25.4 60.485,25.361 60.507,25.328 62.926,22.909 62.959,22.887 62.998,22.879 63.875,22.879 63.906,22.885 65.153,22.885 65.153,21.741 63.29,21.741 59.03,26.001 59.03,29.623 59.03,30.099 60.242,30.099

## Other copper
Top Layer:
  region net GND: 57.938,13.857 58.089,14.008 58.089,14.329 58.323,14.564 58.549,14.564 58.675,14.438 58.675,14.155 58.486,13.966 58.45,13.832 58.402,13.751 58.402,13.792 58.204,13.892 58.024,13.787
  region net VSYS: 49.911,23.4 49.911,23.801 49.911,24.205 50.145,24.439 50.145,25.539 49.553,25.987 49.134,26.001 48.911,26.06 48.134,25.704 48.126,25.545 48.121,25.431 48.185,25.126 49.05,24.788 49.455,24.771 49.455,24.501 49.746,24.211 49.746,23.4
  region net VBAT: 45.44,24.319 45.212,24.638 45.173,24.638 45.173,25.323 45.423,25.572 46.238,25.572 46.398,25.412 46.398,24.677 46.37,24.677 46.011,24.319
  region net VSENS_2: 36.663,13.2 36.401,13.462 35.941,13.462 35.854,13.549 34.983,13.549 34.983,13.121 35.254,12.85 35.71,12.85 35.969,13.109 36.521,13.109
  region net LX2: 50.178,23.836 50.678,24.178 51.689,24.511 52.407,24.984 52.446,24.984 52.592,24.201 51.245,23.727 50.808,23.707 50.178,23.678
  pour cut-out: 51.943,30.099 51.943,35.306 69.85,35.306 69.85,30.226 69.977,30.099
  region net COIL-2: 58.867,11.703 58.405,11.709 58.396,11.903 58.822,11.903 59.548,11.903 60.014,11.436 60.014,7.753 58.934,6.674 58.617,6.991 58.617,7.118 59.379,7.88 59.379,11.182 59.291,11.448 59.071,11.668
  region net VSAT: 35.052,6.858 34.29,6.858 34.036,7.112 32.512,7.112 32.385,6.985 32.385,5.461 32.639,5.207 34.163,5.207 34.29,5.334 34.29,5.969 34.417,5.969 34.671,6.223 35.179,6.223
  region net VSYS: 37.338,12.05 37.338,11.901 37.489,11.75 37.489,11.068 37.638,10.918 37.638,10.499 37.04,10.499 37.04,10.927 37.188,11.075 37.188,12.058
  region net VSYS: 38.013,12.2 38.138,12.075 38.598,12.075 38.772,11.901 39.693,11.901 39.693,12.279 39.474,12.498 38.754,12.498 38.581,12.325 38.208,12.325
  region net VSENS_1: 37.338,13.35 37.338,13.499 37.187,13.65 37.187,14.332 36.989,14.531 36.989,14.901 37.66,14.901 37.687,14.875 37.687,14.524 37.488,14.325 37.488,13.342
  region net VSAT: 37.392,5.503 37.392,5.604 37.12,5.604 36.845,5.879 36.109,5.879 36.109,5.403 36.228,5.283 36.995,5.283 37.104,5.403 37.132,5.403 37.396,5.403
  region net VBAT: 37.695,5.11 37.695,4.285 37.975,4.005 37.975,2.734 38.513,2.734 38.671,2.576 38.738,2.642 39.738,2.642 39.738,3.507 38.877,4.368 38.472,4.368 37.888,4.951 37.888,5.106
  region net NetL5_2: 37.792,5.503 37.792,5.402 38.121,5.402 38.508,5.015 39.692,5.015 39.692,5.993 39.69,5.994 38.501,5.994 38.112,5.605 37.791,5.605
  region net LX1: 50.177,22.632 50.658,22.309 51.741,22.19 52.406,22.082 52.502,22.085 52.626,22.933 52.412,22.935 51.279,22.828 51.056,22.791 50.397,22.791 50.177,22.791
  region net VBAT: 49.747,22.71 49.745,22.707 49.745,22.258 49.454,21.967 49.454,18.711 50.202,18.711 50.202,21.963 49.912,22.254 49.912,22.705
  region net NetC2_2: 47.498,13.589 47.036,14.051 46.261,14.051 46.261,14.638 46.396,14.773 47.223,14.773 47.631,14.365 47.631,13.709
  region net NetC58_1: 45.974,11.288 45.976,11.289 46.377,11.289 47.203,12.115 47.575,12.115 47.575,11.262 47.198,10.885 46.095,10.885 45.904,11.076
  region net VBUS: 57.513,13.775 57.235,14.053 57.235,14.348 57.298,14.348 57.472,14.522 57.474,14.52 57.697,14.52 57.823,14.394 57.823,14.075 57.694,13.946 57.694,13.768
  region net VBUS: 58.557,18.661 58.312,18.661 58.166,18.506 58.142,18.393 58.144,18.393 58.241,18.268 58.453,18.167 58.537,18.163
  region net RX-OUT: 58.805,12.496 58.802,12.493 56.062,12.493 55.672,12.102 54.703,12.102 54.703,12.182 55.314,12.793 56.803,12.793 56.905,12.691 58.809,12.691 58.801,12.682 58.801,12.592
  region net NetC23_1: 57.514,11.702 57.988,11.702 58.001,11.896 57.58,11.896 56.854,11.896 56.388,11.43 56.388,7.747 57.468,6.667 57.785,6.985 57.785,7.112 57.023,7.874 57.023,11.176 57.111,11.442 57.331,11.662
  region net PGND3: 57.705,11.441 58.891,11.441 58.891,10.068 58.459,9.636 57.951,9.636 57.51,10.076 57.51,11.364
Int2 (Sign):
  pour cut-out: 51.943,30.099 51.943,35.306 69.85,35.306 69.85,30.226 69.977,30.099
Int3 (Sign):
  region net GND: 0,16.508 11.876,16.513 11.876,25.95 13.025,27.435 17.119,27.435 17.119,24.738 15.748,23.241 15.095,22.098 15.095,18.855 14.824,15.343 14.478,13.335 12.192,12.192 0,12.192
  pour cut-out: 51.943,30.099 51.943,35.306 69.85,35.306 69.85,30.226 69.977,30.099
Bottom Layer:
  pour cut-out: 51.943,30.099 51.943,35.306 69.85,35.306 69.85,30.226 69.977,30.099
  pour cut-out: 57.46,26.472 64.587,26.472 64.587,29.572 64.46,29.699 57.46,29.699
  pour cut-out: 17.145,29.083 17.145,6.35 17.272,6.223 45.339,6.223 45.339,29.21
Int1 (GND) (plane layer: these items are gaps in the copper):
  pour cut-out: 51.943,30.099 51.943,35.306 69.85,35.306 69.85,30.226 69.977,30.099
  lines w0.2: 58.928,25.959 58.928,29.623 58.928,30.48 59.055,30.607 59.309,30.607 60.579,30.607 60.579,30.297 60.325,30.043 60.325,29.555 60.579,29.301 60.579,28.448 60.579,25.4 62.998,22.981 63.875,22.981 63.881,22.987 65.255,22.987 65.255,21.639 63.247,21.639 58.928,25.959
  lines w0.4: 34.036,3.683 36.195,1.524 37.592,1.524 40.64,4.572 40.64,9.271 40.005,9.906 36.068,9.906 34.036,7.874 34.036,3.683 ; 35.56,27.051 36.322,26.289 36.576,26.035 41.275,26.035 43.307,28.067 43.307,28.829 42.418,29.718 36.322,29.718 35.56,28.956 35.56,27.051 ; 45.847,21.336 47.244,19.939 51.689,19.939 52.324,20.574 52.324,26.289 50.546,28.067 48.387,28.067 47.117,28.067 45.847,26.797 45.847,21.336
Int4 (PWR) (plane layer: these items are gaps in the copper):
  region: 57.277,30.48 57.277,25.908 65.024,25.908 65.024,30.353
  pour cut-out: 51.943,30.099 51.943,35.306 69.85,35.306 69.85,30.226 69.977,30.099
  pour cut-out: -0.381,16.38 11.916,16.386 11.916,23.727 14.989,26.8 17.119,26.8 17.115,24.817 15.133,22.484 15.133,15.145 14.824,14.708 13.589,12.954 12.954,12.319 -0.381,12.319
  lines w0.4: 6.223,0 6.731,0 6.731,2.794 6.767,2.758 9.002,2.758 10.98,4.735 32.727,4.735 36.256,4.735 39.214,1.778 43.053,1.778 43.434,2.159 43.434,5.334 45.974,7.874 45.974,13.208 49.784,17.018 49.784,17.272 49.022,18.034 48.641,18.034 44.323,13.716 44.323,8.763 43.307,7.747 35.814,7.747 32.131,7.747 31.877,7.493 ; 31.877,4.699 31.877,7.747 30.353,7.747 27.806,7.747 27.806,8.267 27.806,8.903 29.063,10.16 39.497,10.16 41.021,11.684 41.021,13.208 42.545,13.208 42.545,11.176 39.116,7.747 ; 38.989,14.385 38.447,13.843 37.973,13.843 35.814,16.002 35.814,22.86 ; 45.974,-0.064 45.974,3.302 49.53,6.858 59.055,6.858 62.103,9.906 62.738,10.541 62.738,13.63 62.144,14.224 61.087,14.224 60.833,13.97 60.833,11.557 58.547,9.271 50.8,9.271 48.768,9.271 48.387,9.652 48.387,12.827 51.308,15.748 51.308,19.685 49.657,21.336 49.657,21.717 49.657,22.606 ; 47.879,17.399 45.339,19.939 45.339,22.225 43.434,24.13 41.656,24.13 35.56,30.226 35.56,30.988 36.068,31.496 38.608,31.496 44.069,26.035 46.228,26.035 49.657,22.606 ; 49.657,21.209 49.657,22.606 ; 35.814,22.86 35.179,22.86 34.798,23.241 34.798,24.003 35.433,24.638 37.592,24.638 39.624,22.606 39.624,20.193 41.021,18.796 41.021,15.24 40.166,14.385 38.862,14.385 38.862,15.656 38.1,16.418 38.1,18.479 38.1,22.098 37.084,23.114 36.068,23.114 35.814,22.86 ; 1.905,20.066 2.921,19.05 9.652,19.05 10.541,19.939 10.541,24.892 12.954,27.305 17.907,27.305 18.699,27.305 29.972,16.032 29.972,13.589 30.988,12.573 32.258,12.573 32.766,13.081 32.766,17.272 20.066,29.972 12.573,29.972 4.191,21.59 2.794,21.59 2.54,21.59 1.905,20.955 1.905,20.066 ; 54.229,16.637 54.229,18.923 54.61,19.304 60.071,19.304 63.754,22.987 65.278,22.987 65.532,22.733 65.532,17.526 64.643,16.637 60.706,16.637 57.658,13.589 57.277,13.589 54.229,16.637

## Silkscreen, mask and mechanical layers (free items; w line width, h text height)
Top Overlay:
  drawing of 151 lines, arcs and shapes, not listed
  text "-" at 42.926,35.071 h0.8 r180
  text "+" at 49.106,31.672 h0.8 r180
  text "1" at 39.266,30.122 h1
  text "Argos Linkit V4.0" at 7.239,7.493 h2.5
  text "Reed switch" at 7.747,4.826 h1
  text "-" at 49.53,3.683 h1.52
  text "+" at 44.069,1.778 h1.52
  text "+" at 52.485,0.038 h1
  text "+" at 59.182,-0.167 h1
  text "-" at 55.753,-0.254 h1.52
  text "-" at 61.956,-0.387 h1.52
Bottom Overlay:
  lines w0.15: 51.96,34.486 51.96,30.094 56.731,30.094 ; 65.189,30.094 67.308,30.094 ; 67.624,30.094 68.578,30.094 ; 68.894,30.094 69.925,30.094
Mechanical 3:
  drawing of 529 lines, arcs and shapes, not listed
  text "Layer" at -8.858,101.727 h1.52
  text "Name" at 1.553,101.727 h1.52
  text "Material" at 35.326,101.727 h1.52
  text "Thickness" at 50.562,101.727 h1.52
  text "Constant" at 67.068,101.727 h1.52
  text "Board Layer Stack" at 81.542,101.727 h1.52
  text "Top Overlay" at 1.553,98.679 h1.52
  text "Top Solder" at 1.553,95.631 h1.52
  text "SM-001" at 35.326,95.631 h1.52
  text "0,025mm" at 50.562,95.631 h1.52
  text "4" at 67.068,95.631 h1.52
  text "Top Surface Finish" at 1.553,92.583 h1.52
  text "PbSn" at 35.326,92.583 h1.52
  text "0,020mm" at 50.562,92.583 h1.52
  text "1" at -8.858,89.535 h1.52
  text "Top Layer" at 1.553,89.535 h1.52
  text "CF-004" at 35.326,89.535 h1.52
  text "0,035mm" at 50.562,89.535 h1.52
  text "Dielectric 1" at 1.553,86.487 h1.52
  text "PP-006" at 35.326,86.487 h1.52
  text "0,071mm" at 50.562,86.487 h1.52
  text "4.1" at 67.068,86.487 h1.52
  text "Dielectric 2" at 1.553,83.439 h1.52
  text "PP-006" at 35.326,83.439 h1.52
  text "0,071mm" at 50.562,83.439 h1.52
  text "4.1" at 67.068,83.439 h1.52
  text "2" at -8.858,80.391 h1.52
  text "Int1 (GND)" at 1.553,80.391 h1.52
  text "CF-004" at 35.326,80.391 h1.52
  text "0,035mm" at 50.562,80.391 h1.52
  text "Dielectric 3" at 1.553,77.343 h1.52
  text "Core-035" at 35.326,77.343 h1.52
  text "0,457mm" at 50.562,77.343 h1.52
  text "4.7" at 67.068,77.343 h1.52
  text "3" at -8.858,74.295 h1.52
  text "Int2 (Sign)" at 1.553,74.295 h1.52
  text "CF-004" at 35.326,74.295 h1.52
  text "0,035mm" at 50.562,74.295 h1.52
  text "Dielectric 4" at 1.553,71.247 h1.52
  text "PP-006" at 35.326,71.247 h1.52
  text "0,071mm" at 50.562,71.247 h1.52
  text "4.1" at 67.068,71.247 h1.52
  text "Dielectric 5" at 1.553,68.199 h1.52
  text "PP-006" at 35.326,68.199 h1.52
  text "0,071mm" at 50.562,68.199 h1.52
  text "4.1" at 67.068,68.199 h1.52
  text "4" at -8.858,65.151 h1.52
  text "Int3 (Sign)" at 1.553,65.151 h1.52
  text "CF-004" at 35.326,65.151 h1.52
  text "0,035mm" at 50.562,65.151 h1.52
  text "Dielectric 6" at 1.553,62.103 h1.52
  text "Core-035" at 35.326,62.103 h1.52
  text "0,457mm" at 50.562,62.103 h1.52
  text "4.7" at 67.068,62.103 h1.52
  text "5" at -8.858,59.055 h1.52
  text "Int4 (PWR)" at 1.553,59.055 h1.52
  text "CF-004" at 35.326,59.055 h1.52
  text "0,035mm" at 50.562,59.055 h1.52
  text "Dielectric 7" at 1.553,56.007 h1.52
  text "PP-006" at 35.326,56.007 h1.52
  text "0,071mm" at 50.562,56.007 h1.52
  text "4.1" at 67.068,56.007 h1.52
  text "Dielectric 8" at 1.553,52.959 h1.52
  text "PP-006" at 35.326,52.959 h1.52
  text "0,071mm" at 50.562,52.959 h1.52
  text "4.1" at 67.068,52.959 h1.52
  text "6" at -8.858,49.911 h1.52
  text "Bottom Layer" at 1.553,49.911 h1.52
  text "CF-004" at 35.326,49.911 h1.52
  text "0,035mm" at 50.562,49.911 h1.52
  text "Bottom Surface Finish" at 1.553,46.863 h1.52
  text "PbSn" at 35.326,46.863 h1.52
  text "0,020mm" at 50.562,46.863 h1.52
  text "Bottom Solder" at 1.553,43.815 h1.52
  text "SM-001" at 35.326,43.815 h1.52
  text "0,025mm" at 50.562,43.815 h1.52
  text "4" at 67.068,43.815 h1.52
  text "Bottom Overlay" at 1.553,40.767 h1.52
Mechanical 8:
  lines w0.254: 4.826,-0.762 40.326,-0.762 40.326,34.738 4.826,34.738 4.826,-0.762
Mechanical 12:
  lines w0.1: 0,3.301 0,3.126 ccw(c3.15,3.151) 3.125,0 66.875,0 ccw(c66.85,3.15) 70,3.125 70,6.425 70,31.875 ccw(c66.85,31.85) 66.875,35.001 ; 0,3.302 0,31.875 cw(c3.15,31.85) 3.125,35.001 ; 3.125,35 66.875,35